# Altium PCB UF_Servo.PcbDoc (part 9 of 12)
Units mm, origin at the board's own origin, x right, y up, seen from the top; angles counter-clockwise.
Board outline 222.63 x 100.1 mm, 6 copper layers (L1, L2, L3, L4, L5, L6), stack 1.609 mm thick; 1138 components, 775 nets, 3720 pads, 1641 vias.
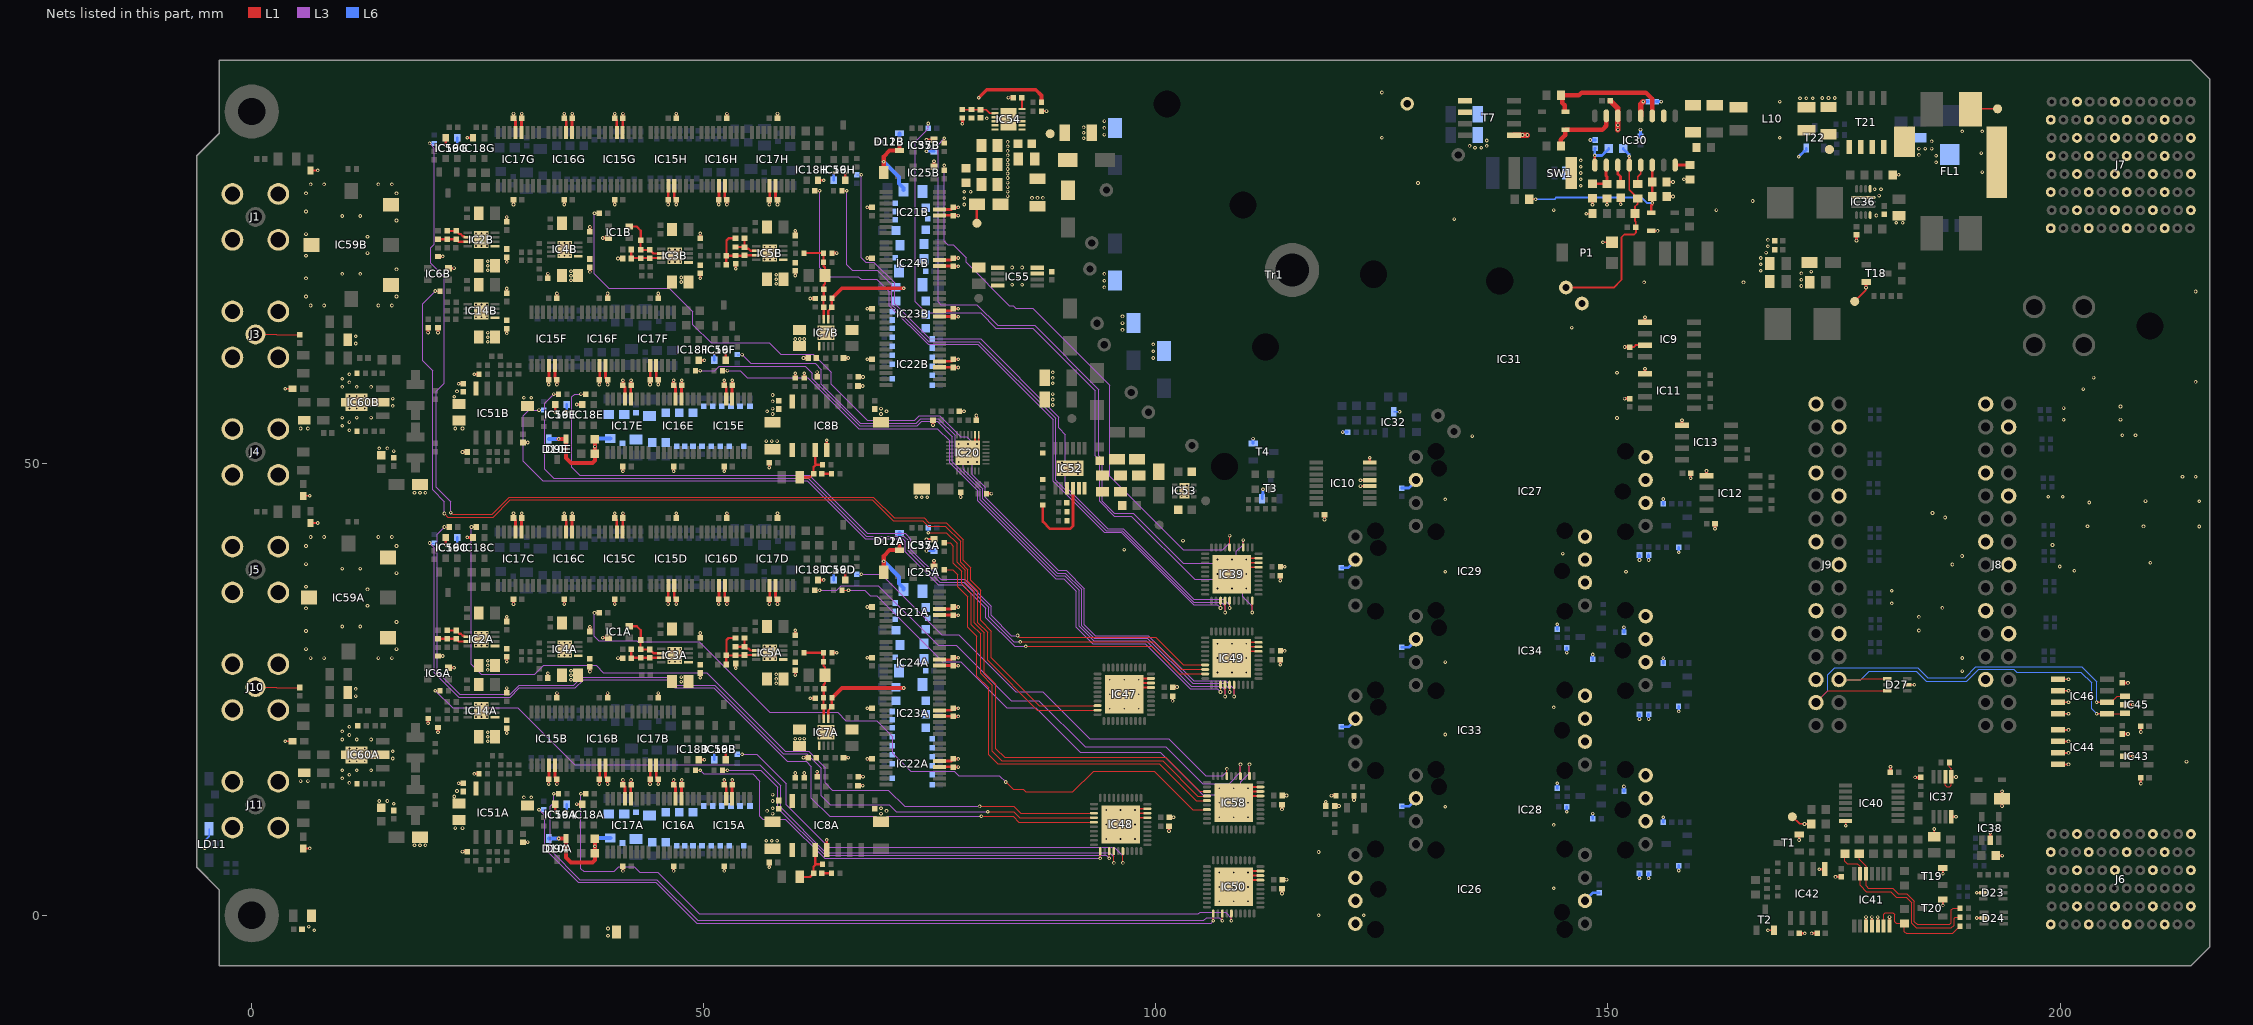
[diagram p10: the nets of this part, all layers, seen from the top]

## Via types
v1: diameter 0.4, hole 0.2, L1 to L6, tented both sides, 1545 vias
v2: diameter 0.4, hole 0.2, L1 to L6, 84 vias
v3: diameter 0.5, hole 0.25, L1 to L6, tented both sides, 12 vias

## Nets (pads, with @x,y where several pads share a name; then routed paths per layer and width w, separated by ;. In a path a pad name is that pad's centre, name@x,y a point inside that pad or via, vN(x,y) a via of type N, cw(c..) or ccw(c..) an arc to the next point about the centre after c; other vN are vias at no path point) (continued)
EXP0_P18: IC47.18 R207G.1 | length 131.2
  L1 w0.1: v1(22,44.6) 22.2,44.4 26.576,44.4 28.476,46.3 68.751,46.3 71.051,44 74.4,44 74.9,43.5 76.8,43.5 78.7,41.6 78.7,39.3 79.5,38.5 79.5,37.1 80.6,36 80.6,32.7 81.8,31.5 81.8,28.557 87.107,23.25 IC47.18@93.55,23.25
  L3 w0.1: v1(19.67,85.43) 20.2,84.9 20.2,74.3 19.8,73.9 19.8,72.151 21.3,70.651 21.3,58.9 20.4,58 20.4,47.4 22,45.8 v1(22,44.6)
  L6 w0.1: v1(19.67,85.43) R207G.1@20.2,85.43
EXP0_P31: IC39.23 R60H.1 | length 74.6
  L1 w0.1: R60H.1@62.27,80.2 v1(62.8,80.2) ; v1(107.15,34.05) IC39.23@107.15,34.85
  L3 w0.1: v1(62.8,80.2) 62.8,71.7 63.8,70.7 67.1,70.7 67.4,70.4 69.1,70.4 70.5,69 70.5,67.5 74.8,63.2 80.3,63.2 88.631,54.869 88.631,48.069 94.3,42.4 96.176,42.4 104.176,34.4 106.8,34.4 v1(107.15,34.05)
EXP1_P4: IC39.24 R61H.1 | length 73.5
  L1 w0.1: R61H.1@65.27,80.2 v1(65.8,80.2) ; v1(107.65,33.55) IC39.24@107.65,34.85
  L3 w0.1: v1(65.8,80.2) 65.8,72 66.4,71.4 69.2,71.4 70.8,69.8 70.8,67.6 74.9,63.5 80.424,63.5 88.9,55.024 88.9,48.2 94.5,42.6 96.276,42.6 104.176,34.7 107.2,34.7 107.65,34.25 v1(107.65,33.55)
EXP1_P5: IC39.25 R207H.1 | length 72.9
  L1 w0.1: v1(108.15,34.05) IC39.25@108.15,34.85
  L3 w0.1: v1(67.43,81.97) 67.43,72.77 67.9,72.3 68.8,72.3 71.1,70 71.1,67.7 75,63.8 80.6,63.8 89.236,55.164 89.236,53.964 90,53.2 90,47.5 94.7,42.8 96.393,42.8 104.193,35 107.5,35 108.15,34.35 v1(108.15,34.05)
  L6 w0.1: R207H.1@66.9,81.97 v1(67.43,81.97)
EXP1_P21: IC39.6 R63B.1 | length 63.2
  L1 w0.1: R63B.1@76.6,82.47 v1(76.6,83) ; IC39.6@108.15,40.75 v1(108.15,42.05)
  L3 w0.1: v1(76.6,83) 76.6,74.6 77,74.2 77.6,74.2 79,72.8 79,72.3 83.8,67.5 84.2,67.5 84.5,67.2 86.4,67.2 94.897,58.703 94.897,48.633 103.03,40.5 107.4,40.5 108.15,41.25 v1(108.15,42.05)
EXP1_P22: IC39.3 R64B.1 | length 74.4
  L1 w0.1: R64B.1@76.6,85.47 v1(76.6,86) ; IC39.3@109.65,40.75 v1(109.65,41.55)
  L3 w0.1: v1(76.6,86) 75.9,85.3 75.9,67.9 76.2,67.6 80.2,67.6 82.5,65.3 86.6,65.3 93.7,58.2 93.7,50.9 94.049,50.551 94.049,45.851 95.4,44.5 97.5,44.5 103,39 104.3,39 108.6,39 108.9,39.3 108.9,40.3 109.65,41.05 v1(109.65,41.55)
EXP1_P23: IC39.30 R209B.1 | length 81.7
  L1 w0.1: v1(110.65,33.55) IC39.30@110.65,34.85
  L3 w0.1: v1(74.83,87.63) 74.83,87.03 73.4,85.6 73.4,67.9 74.6,66.7 80.6,66.7 82.3,65 86.4,65 93.3,58.1 93.3,50.9 93.766,50.434 93.766,45.834 95.4,44.2 97.3,44.2 104.3,37.2 108.9,37.2 109.6,36.5 109.6,35.3 110.65,34.25 v1(110.65,33.55)
  L6 w0.1: R209B.1@74.83,87.1 v1(74.83,87.63)
EXP2_P9: IC49.24 R60F.1 | length 81
  L1 w0.1: R60F.1@49.07,60.3 v1(49.6,60.3) ; v1(107.65,24.25) IC49.24@107.65,25.55
  L3 w0.1: v1(49.6,60.3) 51.2,60.3 51.7,60.8 61.2,60.8 62,60 62,59.4 67.217,54.183 73.607,54.183 74.124,54.7 75.8,54.7 77.5,53 77.5,50.2 80.566,47.134 80.566,46.034 89,37.6 89.9,37.6 91.5,36 91.5,32 93.1,30.4 98.927,30.4 103.927,25.4 107.2,25.4 107.65,24.95 v1(107.65,24.25)
EXP2_P10: IC49.23 R61F.1 | length 75
  L1 w0.1: R61F.1@52.07,60.3 v1(52.6,60.3) ; v1(107.15,24.75) IC49.23@107.15,25.55
  L3 w0.1: v1(52.6,60.3) 54,60.3 54.8,59.5 61.5,59.5 67.117,53.883 75.817,53.883 77.183,52.517 77.183,50.117 80.283,47.017 80.283,45.917 88.9,37.3 89.8,37.3 91.2,35.9 91.2,31.9 93,30.1 98.803,30.1 103.803,25.1 104.3,25.1 106.8,25.1 v1(107.15,24.75)
EXP2_P11: IC49.25 R207F.1 | length 77.1
  L1 w0.1: v1(108.15,24.75) IC49.25@108.15,25.55
  L3 w0.1: v1(54.23,62.07) 55.2,61.1 62.3,61.1 63,60.4 63,58.8 67.317,54.483 73.483,54.483 74,55 75.924,55 77.8,53.124 77.8,50.9 78,50.7 78.4,50.7 78.7,50.4 78.7,49.4 80.849,47.251 80.849,46.151 89.1,37.9 90,37.9 91.8,36.1 91.8,32.1 93.2,30.7 99.051,30.7 104.051,25.7 107.5,25.7 108.15,25.05 v1(108.15,24.75)
  L6 w0.1: R207F.1@53.7,62.07 v1(54.23,62.07)
EXP2_P24: IC49.17 R60E.1 | length 89.8
  L1 w0.1: v1(36.4,57.7) R60E.1@36.93,57.7 ; v1(84.7,31) 84.9,30.8 99.964,30.8 103.014,27.75 IC49.17@105.45,27.75
  L3 w0.1: v1(36.4,57.7) 35.7,57.7 35.4,57.4 35.4,49.6 36.3,48.7 61.673,48.7 68.073,42.3 72.249,42.3 72.9,41.649 72.9,40.5 76.2,37.2 78.849,37.2 81.8,34.249 81.8,33.224 84.024,31 v1(84.7,31)
EXP2_P25: IC49.18 R61E.1 | length 92.7
  L1 w0.1: v1(33.4,57.7) R61E.1@33.93,57.7 ; v1(85,30.3) 99.757,30.3 102.807,27.25 IC49.18@105.45,27.25
  L3 w0.1: v1(33.4,57.7) 32.4,56.7 32.4,49.4 33.4,48.4 61.549,48.4 67.949,42 72.124,42 72.6,41.524 72.6,40.376 76.076,36.9 78.724,36.9 81.5,34.124 81.5,33.1 84.3,30.3 v1(85,30.3)
EXP2_P26: IC49.19 R207E.1 | length 94
  L1 w0.1: v1(85.6,29.8) 99.55,29.8 102.6,26.75 IC49.19@105.45,26.75
  L3 w0.1: v1(31.77,55.93) 30.63,55.93 30,55.3 30,50.3 32.2,48.1 61.424,48.1 67.824,41.7 72,41.7 72.3,41.4 72.3,40.251 75.951,36.6 78.6,36.6 81.2,34 81.2,32.976 84.376,29.8 v1(85.6,29.8)
  L6 w0.1: v1(31.77,55.93) R207E.1@32.3,55.93
EXP2_P27: IC47.19 R32B.1 | length 115.5
  L1 w0.1: v1(20.3,69.1) R32B.1@20.83,69.1 ; v1(21.3,44.5) 21.7,44.1 26.7,44.1 28.6,46 68.627,46 70.927,43.7 74.214,43.7 74.814,43.1 76.7,43.1 78.4,41.4 78.4,39.1 79.2,38.3 79.2,37 80.3,35.9 80.3,32.434 81.4,31.334 81.4,28.25 86.9,22.75 IC47.19@93.55,22.75
  L3 w0.1: v1(20.3,69.1) 18.9,67.7 18.9,61.4 20,60.3 20,47.1 21.3,45.8 v1(21.3,44.5)
EXP2_P28: IC49.26 R6B.1 | length 106.2
  L1 w0.1: v1(37.9,77.7) R6B.1@38.43,77.7 ; v1(108.65,24.25) IC49.26@108.65,25.55
  L3 w0.1: v1(37.9,77.7) 37.9,71 39.5,69.4 46.2,69.4 48.8,66.8 48.8,65.4 50.819,63.381 57.219,63.381 58.5,62.1 62.1,62.1 64.1,60.1 64.1,58.8 68.1,54.8 73.324,54.8 73.812,55.288 76.112,55.288 78.4,53 79.1,53 79.7,52.4 79.7,48.8 81.1,47.4 81.1,46.3 89.2,38.2 90.1,38.2 92.1,36.2 92.1,32.2 93.3,31 99.176,31 104.176,26 107.7,26 108.65,25.05 v1(108.65,24.25)
EXP2_P29: IC48.24 R32A.1 | length 86.6
  L1 w0.1: v1(20.3,24.9) R32A.1@20.83,24.9 ; v1(95.35,5.85) IC48.24@95.35,7.15
  L3 w0.1: v1(20.3,24.9) 22.2,23 29.4,23 35.7,16.7 56.2,16.7 58.5,14.4 58.5,12 63.5,7 94.9,7 95.35,6.55 v1(95.35,5.85)
EXP2_P30: IC58.17 R6A.1 | length 81.8
  L1 w0.1: v1(37.9,33.5) R6A.1@38.43,33.5 ; v1(83.4,14.8) 84.2,14 85.3,14 85.6,13.7 90.8,13.7 93.1,16 99.8,16 104.05,11.75 IC58.17@105.65,11.75
  L3 w0.1: v1(37.9,33.5) 37.9,30.9 38.4,30.4 42.6,30.4 42.7,30.3 49.5,30.3 57.3,22.5 64.8,22.5 65.7,21.6 69.1,21.6 70.9,19.8 70.9,18 72.9,16 77.7,16 78.2,15.5 82.7,15.5 v1(83.4,14.8)
EXP3_P16: IC48.13 R60C.1 | length 93.2
  L1 w0.1: v1(24.3,43) R60C.1@24.83,43 ; v1(80.5,12.1) 84.3,12.1 85.05,11.35 IC48.13@93.15,11.35
  L3 w0.1: v1(24.3,43) 24.3,27.8 25.4,26.7 31.3,26.7 32.3,27.7 38.1,27.7 38.9,26.9 50.3,26.9 59,18.2 61.6,18.2 63.4,16.4 63.4,14.7 64.2,13.9 70.4,13.9 72.2,12.1 v1(80.5,12.1)
EXP3_P17: IC48.14 R61C.1 | length 99.5
  L1 w0.1: v1(21.3,43) R61C.1@21.83,43 ; v1(81.4,11.5) 84.3,11.5 84.95,10.85 IC48.14@93.15,10.85
  L3 w0.1: v1(21.3,43) 20.5,42.2 20.5,27 23,24.5 28.6,24.5 29.6,25.5 35.6,25.5 36.5,26.4 46.1,26.4 47,25.5 51.2,25.5 58.8,17.9 61.4,17.9 63,16.3 63,13.3 64,12.3 70.5,12.3 71.3,11.5 v1(81.4,11.5)
EXP3_P18: IC48.15 R207C.1 | length 98.6
  L1 w0.1: v1(80.7,11) 84.2,11 84.85,10.35 IC48.15@93.15,10.35
  L3 w0.1: v1(19.67,41.23) 20.2,40.7 20.2,26.876 22.876,24.2 28.6,24.2 29.6,25.2 35.8,25.2 36.7,26.1 45.9,26.1 46.8,25.2 51.1,25.2 59.2,17.1 61.3,17.1 61.9,16.5 61.9,13 63.9,11 69,11 69.1,10.9 70.2,10.9 70.3,11 v1(80.7,11)
  L6 w0.1: v1(19.67,41.23) R207C.1@20.2,41.23
EXP3_P31: IC58.4 R60D.1 | length 59.1
  L1 w0.1: R60D.1@62.27,36 v1(62.8,36) ; IC58.4@109.35,15.45 v1(109.35,16.75)
  L3 w0.1: v1(62.8,36) 64.7,36 65.2,36.5 69.3,36.5 75.9,29.9 77.9,29.9 84,23.8 87.063,23.8 92.163,18.7 101.097,18.7 105.197,14.6 108.1,14.6 109.35,15.85 v1(109.35,16.75)
EXP4_P4: IC58.2 R61D.1 | length 58.2
  L1 w0.1: R61D.1@65.27,36 v1(66,36) ; IC58.2@110.35,15.45 v1(110.35,16.75)
  L3 w0.1: v1(66,36) 67.8,36 68.4,35.4 69.1,35.4 76.4,28.1 78.4,28.1 83.5,23 86.731,23 91.631,18.1 100.5,18.1 105.2,13.4 105.5,13.4 108.9,13.4 109.4,13.9 109.4,14.8 110.35,15.75 v1(110.35,16.75)
EXP4_P5: IC58.7 R207D.1 | length 51.5
  L1 w0.1: IC58.7@107.85,15.45 v1(107.85,16.25)
  L3 w0.1: v1(67.43,37.77) 69.63,37.77 76.3,31.1 78.2,31.1 84.5,24.8 87.477,24.8 92.677,19.6 101.4,19.6 105.5,15.5 107.4,15.5 107.85,15.95 v1(107.85,16.25)
  L6 w0.1: R207D.1@66.9,37.77 v1(67.43,37.77)
EXP4_P22: IC58.15 R63A.1 | length 49.3
  L1 w0.1: R63A.1@76.6,38.27 77.53,38.27 78.1,37.7 78.1,36.4 79.2,35.3 79.2,31.9 80.2,30.9 80.2,26.5 81.5,25.2 81.5,17.8 82.486,16.814 100.386,16.814 104.45,12.75 IC58.15@105.65,12.75
EXP4_P23: IC58.14 R64A.1 | length 51.4
  L1 w0.1: R64A.1@76.6,41.27 77.23,41.27 77.6,40.9 77.6,39 78.5,38.1 78.5,36.7 79.6,35.6 79.6,32.2 80.6,31.2 80.6,26.8 81.9,25.5 81.9,18.2 82.932,17.168 100.732,17.168 104.65,13.25 IC58.14@105.65,13.25
EXP4_P24: IC58.13 R209A.1 | length 54
  L1 w0.1: v1(74.83,42.37) 76.83,42.37 78,41.2 78,39.1 78.9,38.2 78.9,36.9 79.9,35.9 79.9,32.4 81,31.3 81,26.9 82.3,25.6 82.3,18.5 83.279,17.521 101.079,17.521 104.85,13.75 IC58.13@105.65,13.75
  L6 w0.1: v1(74.83,42.37) R209A.1@74.83,42.9
EXP5_24: IC50.25 R60A.1 | length 84.7
  L1 w0.1: v1(36.4,13.5) R60A.1@36.93,13.5 ; v1(108.35,-0.55) IC50.25@108.35,0.25
  L3 w0.1: v1(36.4,13.5) 36.4,5.2 36.7,4.9 40.1,4.9 40.6,5.4 42.3,5.4 42.9,4.8 44.9,4.8 49.5,0.2 104.7,0.2 104.9,0.4 107.7,0.4 108.35,-0.25 v1(108.35,-0.55)
EXP5_25: IC50.23 R61A.1 | length 85.5
  L1 w0.1: v1(33.4,13.5) R61A.1@33.93,13.5 ; v1(107.35,-0.55) IC50.23@107.35,0.25
  L3 w0.1: v1(33.4,13.5) 33.4,12.5 33,12.1 33,7.3 36.3,4 44.8,4 49.3,-0.5 105.3,-0.5 105.6,-0.2 107,-0.2 v1(107.35,-0.55)
EXP5_26: IC50.21 R207A.1 | length 83.4
  L1 w0.1: v1(106.35,-0.55) IC50.21@106.35,0.25
  L3 w0.1: v1(31.77,11.73) 32.4,11.1 32.4,7.4 36.1,3.7 44.7,3.7 49.2,-0.8 106.1,-0.8 v1(106.35,-0.55)
  L6 w0.1: v1(31.77,11.73) R207A.1@32.3,11.73
EXP5_P9: IC48.21 R60B.1 | length 51.9
  L1 w0.1: R60B.1@49.07,16.1 v1(49.6,16.1) ; v1(93.85,6.35) IC48.21@93.85,7.15
  L3 w0.1: v1(49.6,16.1) 50,15.7 55.4,15.7 56.2,14.9 56.2,11 56.5,10.7 59,10.7 63.35,6.35 v1(93.85,6.35)
EXP5_P10: IC48.23 R61B.1 | length 49
  L1 w0.1: R61B.1@52.07,16.1 v1(52.6,16.1) ; v1(94.85,6.35) IC48.23@94.85,7.15
  L3 w0.1: v1(52.6,16.1) 56.3,16.1 58.2,14.2 58.2,11.9 63.4,6.7 94.5,6.7 v1(94.85,6.35)
EXP5_P11: IC48.26 R207B.1 | length 50.7
  L1 w0.1: v1(96.35,5.85) IC48.26@96.35,7.15
  L3 w0.1: v1(54.23,17.87) 55.83,17.87 59.1,14.6 59.1,12.3 63.8,7.6 95.4,7.6 96.35,6.65 v1(96.35,5.85)
  L6 w0.1: R207B.1@53.7,17.87 v1(54.23,17.87)
GA0: IC41.6 R130.1 R180.2 | length 12.1
  L1 w0.125: IC41.6@180.494,-1.144 180.494,0.156 180.694,0.356 181.494,0.356 181.694,0.156 181.694,-0.644 181.894,-0.844 R180.2@182.794,-0.844 182.794,-1.744 182.994,-1.944 188.124,-1.944 188.676,-1.392 188.696,-1.392 188.924,-1.164 R130.1@188.924,-1.144
GA1: IC41.12 R131.1 R178.2 | length 18.9
  L1 w0.125: R178.2@177.794,6.856 177.794,6.256 178.544,5.506 IC41.12@178.544,4.656 178.544,3.306 178.794,3.056 181.494,3.056 182.094,2.456 183.024,2.456 183.894,1.586 183.894,-0.644 184.194,-0.944 187.794,-0.944 187.994,-0.744 187.994,0.656 188.194,0.856 R131.1@188.924,0.856 R131.1@188.924,0.876
GA2: IC41.13 R136.1 R165.2 | length 20.2
  L1 w0.125: R165.2@176.194,6.856 176.194,6.056 176.494,5.756 177.594,5.756 177.894,5.456 IC41.13@177.894,4.656 177.894,3.356 178.594,2.656 181.294,2.656 181.894,2.056 182.994,2.056 183.594,1.456 183.594,-0.844 184.094,-1.344 187.994,-1.344 188.294,-1.044 188.294,-0.244 188.394,-0.144 R136.1@188.924,-0.144 ; R136.1@188.924,-0.164 R136.1@188.924,-0.144 ; R136.1@188.924,-0.124 R136.1@188.924,-0.144
GND: C4A.1 C4B.1 C5A.1 C5B.1 C8A.1 C8B.1 C9A.1 C9B.1 C11A.1 C11B.1 C12A.1 C12B.1 C13A.1 C13B.1 C14A.1 C14B.1 C15A.1 C15B.1 C16A.1 C16B.1 C17A.1 C17B.1 C18A.1 C18B.1 C19A.2 C19B.2 C21A.1 C21B.1 C22A.1 C22B.1 C24A.1 C24B.1 C25A.1 C25B.1 C26A.1 C26B.1 C27A.1 C27B.1 C28A.1 C28B.1 C29A.1 C29B.1 C30A.1 C30B.1 C31A.1 C31B.1 C32A.1 C32B.1 C33A.1 C33B.1 C34A.1 C34B.1 C35A.1 C35B.1 C36A.1 C36B.1 C37A.1 C37B.1 C38A.1 C38B.1 C39A.2 C39E.2 C40A.1 C40E.1 C41A.1 C41E.1 C42A.1 C42E.1 C43A.1 C43E.1 C44A.2 C44E.2 C45A.1 C45B.1 C45C.1 C45D.1 C45E.1 C45F.1 C45G.1 C45H.1 C46A.1 C46B.1 C46C.1 C46D.1 C46E.1 C46F.1 C46G.1 C46H.1 C47A.1 C47E.1 C48A.2 C48E.2 C49A.1 C49E.1 C50A.1 C50E.1 C51A.1 C51E.1 C52A.1 C52E.1 C53A.1 C53E.1 C54A.2 C54E.2 C55A.1 C55E.1 C58.1 C61A.1 C61E.1 C62A.1 C62B.1 C62C.1 C62D.1 C62E.1 C62F.1 C62G.1 C62H.1 C63A.1 C63B.1 C63C.1 C63D.1 C63E.1 C63F.1 C63G.1 C63H.1 C64A.2 C64E.2 C65A.1 C65E.1 C66A.1 C66E.1 C67A.2 C67E.2 C68A.1 C68E.1 C69A.1 C69E.1 C70A.1 C70E.1 C71A.1 C71E.1 C72A.1 C72E.1 C73.2 C74.2 C75A.1 C75E.1 C76A.1 C76B.1 C76C.1 C76D.1 C76E.1 C76F.1 C76G.1 C76H.1 C77A.1 C77B.1 C77C.1 C77D.1 C77E.1 C77F.1 C77G.1 C77H.1 C78A.1 C78E.1 C79A.1 C79E.1 C89A.1 C89B.1 C92.2 C93.2 C94A.1 C94B.1 C95A.1 C95B.1 C96A.1 C96B.1 C103A.1 C103B.1 C104A.1 C104B.1 C115A.1 C115B.1 C116A.1 C116B.1 C122.1 C123.1 C124.1 C127.1 C128.1 C148.1 C149.1 C177A.1 C177B.1 C178A.1 C178B.1 C184.1 C185.1 C186.1 C187.1 C188.1 C189A.1 C189B.1 C190A.1 C190B.1 C191.1 C192.1 C193.1 C194.1 C195.2 C196.1 C197.1 C198.1 C199.2 C200.1 C201.1 C202.1 C203.1 C204.1 C205.1 C206.2 C207.1 C208.1 C209.1 C210.1 C211.1 C212.1 C213.1 C214.1 C215.1 C217A.2 C217B.2 C218A.1 C218B.1 C221A.2 C221B.2 D5.2 D6.2 D9A.1 D9E.1 D10A.1 D10E.1 D15.1 D16.1 D17A.1 D17B.1 D18A.1 D18B.1 D19A.1 D19B.1 IC1A.2 IC1B.2 IC2A.9 IC2B.9 IC3A.9 IC3B.9 IC4A.9 IC4B.9 IC5A.9 IC5B.9 IC6A.2 IC6B.2 IC7A.9 IC7B.9 IC8A.11 IC8B.11 IC10.4 IC10.5 IC10.8 IC14A.9 IC14B.9 IC15A.5 IC15B.5 IC15C.5 IC15D.5 IC15E.5 IC15F.5 IC15G.5 IC15H.5 IC16A.5 IC16B.5 IC16C.5 IC16D.5 IC16E.5 IC16F.5 IC16G.5 IC16H.5 IC17A.5 IC17B.5 IC17C.5 IC17D.5 IC17E.5 IC17F.5 IC17G.5 IC17H.5 IC18A.2 IC18B.2 IC18C.2 IC18D.2 IC18E.2 IC18F.2 IC18G.2 IC18H.2 IC19A.2 IC19B.2 IC19C.2 IC19D.2 IC19E.2 IC19F.2 IC19G.2 IC19H.2 IC20.15 IC20.16 IC20.29 IC21A.5 IC21B.5 IC22A.5 IC22B.5 IC23A.5 IC23B.5 IC24A.5 IC24B.5 IC25A.2 IC25B.2 IC26.2 IC26.3 IC26.4 IC27.7 IC28.7 IC29.7 IC32.3 IC33.7 IC34.7 IC35A.2 IC35B.2 IC39.37 IC39.38 IC39.39 IC39.41 IC47.37 IC47.38 IC47.39 IC47.41 IC48.37 IC48.38 IC48.39 IC48.41 IC49.37 IC49.38 IC49.39 IC49.41 IC50.37 IC50.38 IC50.39 IC50.41 IC52.9 IC52.13 IC53.5 IC53.7 IC54.9 IC55.3 IC55.4 IC55.5 IC55.8 IC56A.2 IC56B.2 IC56C.2 IC56D.2 IC56E.2 IC56F.2 IC56G.2 IC56H.2 IC57A.2 IC57B.2 IC58.37 IC58.38 IC58.39 IC58.41 IC59A.4 IC59A.5 IC59A.6 IC59B.4 IC59B.5 IC59B.6 IC60A.2 IC60A.4 IC60B.2 IC60B.4 J1.2 J3.2 J4.2 J5.2 J10.2 J11.2 R12A.1 R12B.1 R17A.1 R17B.1 R19A.1 R19B.1 R22A.1 R22B.1 R41A.1 R41B.1 R44A.1 R44B.1 R47A.1 R47B.1 R51A.1 R51B.1 R52A.1 R52B.1 R55A.2 R55B.2 R58A.1 R58B.1 R69A.1 R69B.1 R74A.1 R74B.1 R78.1 R83.1 R84.1 R116.1 R118.1 R122.1 R123.1 R124.1 R125.1 R198.1 R199.1 R200.1 R201.1 R203.2 R204.1 R205.1 R206.1 R211.1 R213A.1 R213B.1 R220A.1 R220B.1 R221A.1 R221B.1 R222A.1 R222B.1 R223A.1 R223B.1 T3.2 T4.2 | length 243.9
  L1 w0.2: v1(3.7,19.3) D19A.1@4.5,19.3 ; v1(3.7,58.3) D19B.1@4.5,58.3 ; D17A.1@5.7,7.45 v1(6.4,7.45) ; D17B.1@5.7,46.45 v1(6.4,46.45) ; D18A.1@6.5,43.45 v1(7.3,43.45) ; D18B.1@6.5,82.45 v1(7.3,82.45) ; v1(79.2,51.2) IC20.29@80,52 ; IC20.16@80,53.2 IC20.29@80,52 ; IC20.15@80.4,53.2 80.4,52.4 IC20.29@80,52 ; v1(83.68,90.5) R204.1@84.23,90.5 ; R203.2@87.35,89 v1(87.9,89) ; v1(96.1,10.1) 96.85,10.85 IC48.37@99.05,10.85 ; v1(96.5,24.5) 97.25,25.25 IC47.37@99.45,25.25 ; IC48.38@99.05,11.35 98.05,11.35 v1(97.7,11.7) 97.85,11.85 IC48.39@99.05,11.85 ; IC47.38@99.45,25.75 98.45,25.75 v1(98.1,26.1) 98.25,26.25 IC47.39@99.45,26.25 ; v1(108.4,28.5) 109.15,29.25 IC49.37@111.35,29.25 ; v1(108.4,37.8) 109.15,38.55 IC39.37@111.35,38.55 ; v1(108.6,3.2) 109.35,3.95 IC50.37@111.55,3.95 ; v1(108.6,12.5) 109.35,13.25 IC58.37@111.55,13.25 ; IC49.38@111.35,29.75 110.35,29.75 v1(110,30.1) 110.15,30.25 IC49.39@111.35,30.25 ; IC39.38@111.35,39.05 110.35,39.05 v1(110,39.4) 110.15,39.55 IC39.39@111.35,39.55 ; IC50.38@111.55,4.45 110.55,4.45 v1(110.2,4.8) 110.35,4.95 IC50.39@111.55,4.95 ; IC58.38@111.55,13.75 110.55,13.75 v1(110.2,14.1) 110.35,14.25 IC58.39@111.55,14.25 ; v1(122.625,47.525) IC10.4@123.65,47.525 ; v1(122.625,48.175) IC10.5@123.65,48.175
  L1 w0.3: v1(19.5,21.3) R213A.1@19.5,21.83 ; v1(19.5,64.5) R213B.1@19.5,65.03 ; v1(20.6,20.3) R58A.1@20.6,20.83 ; R12A.1@20.6,28.73 v1(21.13,28.73) ; v1(20.6,64.5) R58B.1@20.6,65.03 ; R12B.1@20.6,72.93 v1(21.13,72.93) ; v1(21.465,41.02) IC19C.2@21.465,41.85 ; v1(21.465,85.22) IC19G.2@21.465,86.05 ; IC6A.2@21.75,27.435 v1(22.38,27.435) ; IC6B.2@21.75,71.635 v1(22.38,71.635) ; v1(22.87,14.65) C95A.1@23.4,14.65 ; v1(22.87,58.85) C95B.1@23.4,58.85 ; v1(23.3,7.1) R69A.1@23.83,7.1 ; v1(23.3,51.3) R69B.1@23.83,51.3 ; v1(23.835,41.85) IC18C.2@24.465,41.85 ; v1(23.835,86.05) IC18G.2@24.465,86.05 ; v1(24.6,15.7) R74A.1@25.13,15.7 ; v1(24.6,59.9) R74B.1@25.13,59.9 ; v1(28.2,20.22) C38A.1@28.2,20.75 ; C24A.1@28.2,24.65 v1(28.2,25.18) ; v1(28.2,28.12) C22A.1@28.2,28.65 ; C4A.1@28.2,32.55 v1(28.2,33.08) ; v1(28.2,64.42) C38B.1@28.2,64.95 ; C24B.1@28.2,68.85 v1(28.2,69.38) ; v1(28.2,72.32) C22B.1@28.2,72.85 ; C4B.1@28.2,76.75 v1(28.2,77.28) ; v1(28.95,34.47) C76C.1@28.95,35 ; v1(28.95,44.53) C77C.1@28.95,44 29.175,43.775 IC17C.5@29.175,42.45 ; v1(28.95,78.67) C76G.1@28.95,79.2 ; v1(28.95,88.73) C77G.1@28.95,88.2 29.175,87.975 IC17G.5@29.175,86.65 ; C189A.1@30,8.15 v1(30.53,8.15) ; C189B.1@30,52.35 v1(30.53,52.35) ; C34A.1@32.75,26.3 v1(32.75,26.83) ; C34B.1@32.75,70.5 v1(32.75,71.03) ; IC15B.5@33.525,16.65 33.525,15.325 C46B.1@33.75,15.1 v1(33.75,14.57) ; IC15F.5@33.525,60.85 33.525,59.525 C46F.1@33.75,59.3 v1(33.75,58.77) ; v1(33.565,11.52) IC19A.2@33.565,12.35 ; v1(33.565,55.72) IC19E.2@33.565,56.55 ; C45B.1@33.75,24.1 v1(33.75,24.63) ; C45F.1@33.75,68.3 v1(33.75,68.83) ; v1(34.55,34.47) C62C.1@34.55,35 ; v1(34.55,44.53) C63C.1@34.55,44 34.775,43.775 IC16C.5@34.775,42.45 ; v1(34.55,78.67) C62G.1@34.55,79.2 ; v1(34.55,88.73) C63G.1@34.55,88.2 34.775,87.975 IC16G.5@34.775,86.65 ; v1(35.935,12.35) IC18A.2@36.565,12.35 ; v1(35.935,56.55) IC18E.2@36.565,56.55 ; v1(37.4,27.02) C29A.1@37.4,27.55 ; C13A.1@37.4,31.45 v1(37.4,31.98) ; v1(37.4,71.22) C29B.1@37.4,71.75 ; C13B.1@37.4,75.65 v1(37.4,76.18) ; v1(38.82,30.765) IC1A.2@39.45,30.765 ; v1(38.82,74.965) IC1B.2@39.45,74.965 ; IC16B.5@39.125,16.65 39.125,15.325 C63B.1@39.35,15.1 v1(39.35,14.57) ; IC16F.5@39.125,60.85 39.125,59.525 C63F.1@39.35,59.3 v1(39.35,58.77) ; C62B.1@39.35,24.1 v1(39.35,24.63) ; C62F.1@39.35,68.3 v1(39.35,68.83) ; v1(40.15,34.47) C45C.1@40.15,35 ; v1(40.15,44.53) C46C.1@40.15,44 40.375,43.775 IC15C.5@40.375,42.45 ; v1(40.15,78.67) C45G.1@40.15,79.2 ; v1(40.15,88.73) C46G.1@40.15,88.2 40.375,87.975 IC15G.5@40.375,86.65 ; v1(40.5,28.5) R22A.1@41.03,28.5 ; v1(40.5,72.7) R22B.1@41.03,72.7 ; v1(41.05,4.97) C76A.1@41.05,5.5 ; v1(41.05,15.03) C77A.1@41.05,14.5 41.275,14.275 IC17A.5@41.275,12.95 ; v1(41.05,49.17) C76E.1@41.05,49.7 ; v1(41.05,59.23) C77E.1@41.05,58.7 41.275,58.475 IC17E.5@41.275,57.15 ; IC17B.5@44.725,16.65 44.725,15.325 C77B.1@44.95,15.1 v1(44.95,14.57) ; IC17F.5@44.725,60.85 44.725,59.525 C77F.1@44.95,59.3 v1(44.95,58.77) ; C76B.1@44.95,24.1 v1(44.95,24.63) ; C76F.1@44.95,68.3 v1(44.95,68.83) ; v1(46.65,4.97) C62A.1@46.65,5.5 ; v1(46.65,15.03) C63A.1@46.65,14.5 46.875,14.275 IC16A.5@46.875,12.95 ; v1(46.65,49.17) C62E.1@46.65,49.7 ; v1(46.65,59.23) C63E.1@46.65,58.7 46.875,58.475 IC16E.5@46.875,57.15 ; IC15D.5@46.725,36.55 46.725,35.225 C46D.1@46.95,35 v1(46.95,34.47) ; IC15H.5@46.725,80.75 46.725,79.425 C46H.1@46.95,79.2 v1(46.95,78.67) ; C45D.1@46.95,44 v1(46.95,44.53) ; C45H.1@46.95,88.2 v1(46.95,88.73) ; IC18B.2@49.435,17.25 v1(50.065,17.25) ; IC18F.2@49.435,61.45 v1(50.065,61.45) ; v1(49.6,26.32) C27A.1@49.6,26.85 ; C11A.1@49.6,30.75 v1(49.6,31.28) ; v1(49.6,70.52) C27B.1@49.6,71.05 ; C11B.1@49.6,74.95 v1(49.6,75.48) ; v1(52.25,4.97) C45A.1@52.25,5.5 ; v1(52.25,15.03) C46A.1@52.25,14.5 52.475,14.275 IC15A.5@52.475,12.95 ; v1(52.25,49.17) C45E.1@52.25,49.7 ; v1(52.25,59.23) C46E.1@52.25,58.7 52.475,58.475 IC15E.5@52.475,57.15 ; IC16D.5@52.325,36.55 52.325,35.225 C63D.1@52.55,35 v1(52.55,34.47) ; IC16H.5@52.325,80.75 52.325,79.425 C63H.1@52.55,79.2 v1(52.55,78.67) ; IC19B.2@52.435,17.25 v1(52.435,18.08) ; IC19F.2@52.435,61.45 v1(52.435,62.28) ; C62D.1@52.55,44 v1(52.55,44.53) ; C62H.1@52.55,88.2 v1(52.55,88.73) ; v1(53.53,27.37) R41A.1@53.53,27.9 ; v1(53.53,71.57) R41B.1@53.53,72.1 ; v1(57.23,5.37) R55A.2@57.23,5.9 ; v1(57.23,49.57) R55B.2@57.23,50.1 ; IC17D.5@57.925,36.55 57.925,35.225 C77D.1@58.15,35 v1(58.15,34.47) ; IC17H.5@57.925,80.75 57.925,79.425 C77H.1@58.15,79.2 v1(58.15,78.67) ; C76D.1@58.15,44 v1(58.15,44.53) ; C76H.1@58.15,88.2 v1(58.15,88.73) ; R51A.1@60.1,15.27 v1(60.1,15.8) ; v1(60.1,26.62) C31A.1@60.1,27.15 ; C15A.1@60.1,31.05 v1(60.1,31.58) ; R51B.1@60.1,59.47 v1(60.1,60) ; v1(60.1,70.82) C31B.1@60.1,71.35 ; C15B.1@60.1,75.25 v1(60.1,75.78) ; v1(61.02,17.5) C33A.1@61.55,17.5 ; v1(61.02,61.7) C33B.1@61.55,61.7 ; R52A.1@61.1,15.27 v1(61.1,15.8) ; R52B.1@61.1,59.47 v1(61.1,60) ; v1(61.77,24.07) R44A.1@62.3,24.07 ; v1(61.77,68.27) R44B.1@62.3,68.27 ; R47A.1@62.53,15.4 v1(62.53,15.93) ; R47B.1@62.53,59.6 v1(62.53,60.13) ; IC18D.2@62.635,37.15 v1(63.265,37.15) ; IC18H.2@62.635,81.35 v1(63.265,81.35) ; IC8A.11@63.6,7.3 v1(63.6,8.4) ; IC8B.11@63.6,51.5 v1(63.6,52.6) ; R19A.1@64.17,29.1 v1(64.7,29.1) ; R19B.1@64.17,73.3 v1(64.7,73.3) ; C17A.1@65.45,17.5 v1(65.98,17.5) ; C17B.1@65.45,61.7 v1(65.98,61.7) ; IC19D.2@65.635,37.15 v1(65.635,37.98) ; IC19H.2@65.635,81.35 v1(65.635,82.18) ; C19A.2@67.05,14.4 v1(67.58,14.4) ; C19B.2@67.05,58.6 v1(67.58,58.6) ; R17A.1@67.07,15.4 v1(67.6,15.4) ; R17B.1@67.07,59.6 v1(67.6,59.6) ; v1(68.07,17.35) C103A.1@68.6,17.35 ; v1(68.07,22.95) C115A.1@68.6,22.95 ; v1(68.07,28.55) C177A.1@68.6,28.55 ; v1(68.07,34.15) C89A.1@68.6,34.15 ; v1(68.07,61.55) C103B.1@68.6,61.55 ; v1(68.07,67.15) C115B.1@68.6,67.15 ; v1(68.07,72.75) C177B.1@68.6,72.75 ; v1(68.07,78.35) C89B.1@68.6,78.35 ; v1(74.62,41.635) IC35A.2@75.45,41.635 ; v1(74.62,85.835) IC35B.2@75.45,85.835 ; v1(75.35,54.27) C192.1@75.35,54.8 ; IC25A.2@75.45,38.635 v1(75.45,39.265) ; IC25B.2@75.45,82.835 v1(75.45,83.465) ; IC22A.5@76.05,17.125 77.375,17.125 C104A.1@77.6,17.35 v1(78.13,17.35) ; IC23A.5@76.05,22.725 77.375,22.725 C116A.1@77.6,22.95 v1(78.13,22.95) ; IC24A.5@76.05,28.325 77.375,28.325 C178A.1@77.6,28.55 v1(78.13,28.55) ; IC21A.5@76.05,33.925 77.375,33.925 C96A.1@77.6,34.15 v1(78.13,34.15) ; IC22B.5@76.05,61.325 77.375,61.325 C104B.1@77.6,61.55 v1(78.13,61.55) ; IC23B.5@76.05,66.925 77.375,66.925 C116B.1@77.6,67.15 v1(78.13,67.15) ; IC24B.5@76.05,72.525 77.375,72.525 C178B.1@77.6,72.75 v1(78.13,72.75) ; IC21B.5@76.05,78.125 77.375,78.125 C96B.1@77.6,78.35 v1(78.13,78.35) ; C191.1@78.25,55.8 v1(78.78,55.8) ; v1(78.4,46.32) C193.1@78.4,46.85 ; v1(78.6,87.6) R206.1@78.6,88.23 ; C194.1@80.15,54.8 v1(80.15,55.33) ; R78.1@81.27,46.7 v1(81.8,46.7) ; R123.1@101.42,10.9 v1(101.95,10.9) ; v1(101.45,9.37) C186.1@101.45,9.9 ; R125.1@101.82,25.3 v1(102.35,25.3) ; v1(101.85,23.77) C185.1@101.85,24.3 ; R124.1@113.72,29.3 v1(114.25,29.3) ; R122.1@113.72,38.6 v1(114.25,38.6) ; v1(113.75,27.77) C187.1@113.75,28.3 ; v1(113.75,37.07) C184.1@113.75,37.6 ; R116.1@113.92,4 v1(114.45,4) ; R211.1@113.92,13.3 v1(114.45,13.3) ; v1(113.95,2.47) C188.1@113.95,3 ; v1(113.95,11.77) C215.1@113.95,12.3 ; v1(118.65,43.82) C58.1@118.65,44.35 ; C123.1@118.776,12.094 v1(118.776,12.624) ; v1(119.426,13.294) R84.1@119.956,13.294 ; C122.1@119.726,12.144 v1(120.256,12.144) ; v1(121.906,12.814) R83.1@121.906,13.344 ; IC10.8@123.65,50.125 v1(123.65,50.655)
  L1 w0.45: v1(33.95,8.55) D9A.1@34.75,8.55 34.75,6.45 35.3,5.9 37.686,5.9 37.95,6.164 C78A.1@37.95,6.9 v1(37.95,7.7) C79A.1@37.95,8.5 ; v1(33.95,52.75) D9E.1@34.75,52.75 34.75,50.65 35.3,50.1 37.686,50.1 37.95,50.364 C78E.1@37.95,51.1 v1(37.95,51.9) C79E.1@37.95,52.7
  L6 w0.2: IC32.3@126.3,55.75 v1(126.95,55.75)
  L6 w0.3: v1(22.735,41.02) IC56C.2@22.735,41.85 ; v1(22.735,85.22) IC56G.2@22.735,86.05 ; v1(34.835,11.52) IC56A.2@34.835,12.35 ; v1(34.835,55.72) IC56E.2@34.835,56.55 ; IC56B.2@51.165,17.25 v1(51.165,18.08) ; IC56F.2@51.165,61.45 v1(51.165,62.28) ; IC56D.2@64.365,37.15 v1(64.365,37.98) ; IC56H.2@64.365,81.35 v1(64.365,82.18) ; v1(74.62,40.365) IC57A.2@75.45,40.365 ; v1(74.62,84.565) IC57B.2@75.45,84.565 ; T4.2@110.75,52.25 v1(110.75,52.78) ; T3.2@111.75,46.15 111.75,46.575 111.85,46.675 v1(111.85,47.18) ; C148.1@120.494,20.906 121.287,20.906 122.032,21.65 IC33.7@122.062,21.65 ; C128.1@120.494,38.506 121.287,38.506 122.032,39.25 IC29.7@122.062,39.25 ; v1(120.67,53.5) R118.1@121.2,53.5 ; C127.1@127.194,12.106 127.987,12.106 128.732,12.85 IC28.7@128.762,12.85 ; C149.1@127.194,29.706 127.987,29.706 128.732,30.45 IC34.7@128.762,30.45 ; C124.1@127.194,47.306 127.987,47.306 128.732,48.05 IC27.7@128.762,48.05
  L6 w0.45: D10A.1@32.85,8.55 v1(33.95,8.55) ; D10E.1@32.85,52.75 v1(33.95,52.75) ; v1(37.95,7.7) 37.95,8.25 38.3,8.6 C71A.1@39.65,8.6 ; v1(37.95,51.9) 37.95,52.45 38.3,52.8 C71E.1@39.65,52.8
  other v1: 117.994,0.056 122.994,0.056 107,1.6 108.6,1.6 110.2,1.6 107,3.2 110.2,3.2 107,4.8 108.6,4.8 117.994,7.056 18,7.8 18.6,7.8 19.2,7.8 94.5,8.5 96.1,8.5 97.7,8.5 22.5,9.7 23.3,9.7 94.5,10.1 97.7,10.1 107,10.9 108.6,10.9 110.2,10.9 57.6,11.3 69.6,11.3 57,11.6 70.2,11.6 94.5,11.7 96.1,11.7 57.6,11.9 69.6,11.9 131.994,12.056 15.7,12.4 107,12.5 110.2,12.5 14.1,12.7 15,12.7 30.1,13.1 30.9,13.1 107,14.1 108.6,14.1 10.8,14.7 5.4,14.9 6.2,14.9 10,15.2 10.8,15.6 10,16.1 11.6,16.1 13.2,16.1 15.6,17.4 15.6,18.2 10,19.5 11.6,19.5 13.2,19.5 10.8,20 131.994,20.056 10,20.4 10.8,20.9 94.9,22.9 96.5,22.9 98.1,22.9 11.5,24.3 94.9,24.5 98.1,24.5 11.5,25.1 94.9,26.1 96.5,26.1 106.8,26.9 108.4,26.9 110,26.9 131.994,28.056 6.5,28.5 8,28.5 14,28.5 15.5,28.5 106.8,28.5 110,28.5 6,29.5 16,29.5 106.8,30.1 108.4,30.1 6,31.5 10,32 12,32 16,32.5 6,34 12.8,34.3 12.8,36.1 106.8,36.2 108.4,36.2 110,36.2 6,36.4 106.8,37.8 110,37.8 16,37.9 131.994,38.056 10,38.4 12,38.4 6,38.9 106.8,39.4 108.4,39.4 96.5,40.5 6,40.9 16,40.9 103,41.5 6.5,41.9 8,41.9 14,41.9 15.5,41.9 131.994,46.056 73.5,46.3 74.1,46.3 74.7,46.3 102.85,46.4 103.45,46.4 18,46.8 18.6,46.8 19.2,46.8 103.15,47 102.85,47.6 103.45,47.6 89.625,48.843 91.375,48.857 90.5,49.5 89.625,50.143 91.375,50.157 80.217,50.177 78.2,50.2 79.2,50.2 80.217,51.177 78.2,51.2 15.7,51.4 14.1,51.7 15,51.7 78.2,52.2 79.2,52.2 80.2,52.2 134.994,53.056 10.8,53.7 5.4,53.9 6.2,53.9 22.5,53.9 23.3,53.9 10,54.2 10.8,54.6 10,55.1 11.6,55.1 13.2,55.1 57.6,55.5 69.6,55.5 57,55.8 70.2,55.8 57.6,56.1 69.6,56.1 15.6,56.4 88.6,56.5 88.6,57.1 15.6,57.2 30.1,57.3 30.9,57.3 88.6,57.7 10,58.5 11.6,58.5 13.2,58.5 88.6,58.9 10.8,59 10,59.4 88.6,59.5 10.8,59.9 88.6,60.1 99.7,61.7 99.7,62.45 99.7,63.2 11.5,63.3 11.5,64.1 96.3,64.8 96.3,65.55 96.3,66.3 6.5,67.5 8,67.5 14,67.5 15.5,67.5 6,68.5 16,68.5 94.3,69.5 84.1,69.8 85.2,69.8 94.3,70.25 6,70.5 84.7,70.7 10,71 12,71 94.3,71 16,71.5 84.1,71.7 85.2,71.7 6,73 12.8,73.3 12.8,75.1 6,75.4 16,76.9 10,77.4 12,77.4 6,77.9 86.3,79.4 86.9,79.4 87.5,79.4 83.6,79.6 6,79.9 16,79.9 83.6,80.1 83.6,80.6 6.5,80.9 8,80.9 14,80.9 15.5,80.9 83.6,81.1 83.6,81.6 83.6,82.1 83.6,82.6 83.6,83.1 83.6,83.6 83.6,84.1 83.6,84.6 83.6,85.1 83.6,85.6 92,86 94.3,86.4 92,86.6 94.3,87.15 92,87.2 94.3,87.9 81.3,88.2
  other v2: 10.8,17.1 11.6,17.1 12.5,17.1 10.8,18.5 11.6,18.5 12.5,18.5 62.8,19.7 64.2,19.7 62.8,20.3 64.2,20.3 62.8,20.9 64.2,20.9 24.8,22 25.4,22 26,22 24.8,23.4 25.4,23.4 26,23.4 46.2,28.1 46.8,28.1 47.4,28.1 56.7,28.4 57.3,28.4 57.9,28.4 34,28.8 34.6,28.8 35.2,28.8 46.2,29.5 46.8,29.5 47.4,29.5 56.7,29.8 57.3,29.8 57.9,29.8 24.8,29.9 25.4,29.9 26,29.9 34,30.2 34.6,30.2 35.2,30.2 24.8,31.3 25.4,31.3 26,31.3 10.8,56.1 11.6,56.1 12.5,56.1 10.8,57.5 11.6,57.5 12.5,57.5 62.8,63.9 64.2,63.9 62.8,64.5 64.2,64.5 62.8,65.1 64.2,65.1 24.8,66.2 25.4,66.2 26,66.2 24.8,67.6 25.4,67.6 26,67.6 46.2,72.3 46.8,72.3 47.4,72.3 56.7,72.6 57.3,72.6 57.9,72.6 34,73 34.6,73 35.2,73 46.2,73.7 46.8,73.7 47.4,73.7 56.7,74 57.3,74 57.9,74 24.8,74.1 25.4,74.1 26,74.1 34,74.4 34.6,74.4 35.2,74.4 24.8,75.5 25.4,75.5 26,75.5
GND_DIOT: B30.1 B31.1 B32.1 C1.1 C2.2 C56.1 C57.1 C59.1 C60.1 C121.1 C125.1 C126.1 C129.1 C133.1 C134.1 C147.1 C150.1 C151.1 C152.1 C153.1 C158.1 C159.1 C160.1 C161.1 C162.1 C163.2 C164.1 C165.1 C166.1 C167.1 C169.1 C170.1 C171.1 C173.1 C174.2 C179.1 C180.1 C181.1 C182.1 C219.1 C220.1 C298.1 C306.1 C307.1 D21.2 D23.2 D24.2 D27.2 FL1.4 IC9.1 IC9.3 IC11.5 IC12.5 IC13.5 IC26.7 IC27.2 IC27.3 IC27.4 IC28.2 IC28.3 IC28.4 IC29.2 IC29.3 IC29.4 IC33.2 IC33.3 IC33.4 IC34.2 IC34.3 IC34.4 IC36.3 IC36.4 IC36.11 IC37.4 IC37.5 IC37.6 IC38.2 IC40.7 IC41.3 IC41.4 IC41.5 IC41.7 IC42.1 IC43.2 IC44.1 IC44.2 IC44.3 IC44.4 IC45.2 IC46.1 IC46.2 IC46.3 IC46.4 J6.A2 J6.A4 J6.A6 J6.C1 J6.C5 J6.D2 J6.D4 J6.D6 J6.F1 J6.F5 J6.G2 J6.G4 J6.G6 J6.I1 J6.I5 J6.J2 J6.J4 J6.J6 J6.L1 J6.L5 J7.A2 J7.A4 J7.A6 J7.C1 J7.C3 J7.C5 J7.C7 J7.D2 J7.D4 J7.D6 J7.F1 J7.F3 J7.F5 J7.F7 J7.G2 J7.G4 J7.G6 J7.G8 J7.I1 J7.I3 J7.I5 J7.I7 J7.J2 J7.J4 J7.J6 J7.J8 J7.L1 J7.L3 J7.L5 J7.L7 J8.1 J8.4 J8.7 J8.10 J8.13 J8.16 J8.19 J8.22 J8.25 J9.1 J9.4 J9.7 J9.10 J9.13 J9.16 J9.19 J9.22 J9.25 L10.2 LD11.1 R1.2 R2.2 R85.1 R86.1 R91.1 R92.1 R93.1 R94.1 R99.1 R119.1 R120.1 R121.1 R129.1 R137.1 T1.2 T2.2 T18.2 T19.2 T20.2 T22.2 | length 68.3
  L1 w0.125: IC37.6@187.319,15.356 187.319,14.431 187.494,14.256 187.794,14.256 187.969,14.431 IC37.5@187.969,15.356 ; R137.1@187.764,16.956 187.764,16.486 187.969,16.281 IC37.5@187.969,15.356 ; v1(188.494,15.356) IC37.5@187.969,15.356
  L1 w0.15: B31.1@170.394,10.956 171.194,10.156 v1(171.744,10.156) ; B30.1@177.294,67.956 178.531,69.193 178.531,69.468 v1(178.544,69.481) ; FL1.4@190.094,89.206 190.144,89.256 B32.1@193.094,89.256
  L1 w0.2: C56.1@152.394,62.906 152.844,62.906 153.059,63.121 IC9.3@154.094,63.121 ; v1(167.694,-1.594) T2.2@168.344,-1.594 ; v1(171.744,10.156) C182.1@172.494,10.156 ; v1(176.294,9.956) IC40.7@176.294,10.506 ; IC41.3@178.544,-1.144 v1(178.544,-0.144) ; IC41.4@179.194,-1.144 v1(179.194,-0.144) ; IC41.5@179.844,-1.144 v1(179.844,-0.144) ; IC41.7@181.144,-1.144 v1(181.144,-0.144) ; R129.1@181.494,81.956 v1(182.144,81.956) ; D27.2@183.094,25.556 v1(183.894,25.556) ; C179.1@186.094,8.756 v1(186.094,9.606) ; v1(187.044,1.156) T20.2@187.044,1.806 ; v1(187.044,4.656) T19.2@187.044,5.306 ; v1(190.794,-0.244) D24.2@191.594,-0.244 ; v1(190.794,2.556) D23.2@191.494,2.556 D23.2@191.594,2.556 ; IC44.4@199.794,16.751 v1(200.944,16.751) ; IC44.3@199.794,18.021 v1(200.944,18.021) ; IC44.2@199.794,19.291 v1(200.944,19.291) ; IC44.1@199.794,20.561 v1(200.944,20.561) ; IC46.4@199.794,22.351 v1(200.944,22.351) ; IC46.3@199.794,23.621 v1(200.944,23.621) ; IC46.2@199.794,24.891 v1(200.944,24.891) ; IC46.1@199.794,26.161 v1(200.944,26.161) ; IC43.2@207.194,17.656 v1(208.044,17.656) ; IC45.2@207.194,23.356 v1(208.044,23.356)
  L1 w0.3: v1(151.844,57.206) C57.1@152.394,57.206 ; v1(151.844,62.906) C56.1@152.394,62.906 ; IC11.5@154.094,59.961 v1(154.094,60.511) ; IC9.1@154.094,65.661 v1(154.094,66.211) ; IC13.5@158.194,54.261 v1(158.194,54.811) ; v1(159.144,48.406) C60.1@159.144,48.956 ; IC12.5@160.894,48.661 v1(160.894,49.211) ; v1(161.844,42.806) C59.1@161.844,43.356 ; C181.1@171.144,-1.944 v1(171.768,-1.944) ; v1(171.144,8.381) T1.2@171.144,9.006 ; v1(172.519,-1.944) C180.1@173.144,-1.944 ; v1(173.374,5.156) IC42.1@173.999,5.156 ; v1(175.169,4.306) C1.1@175.794,4.306 ; v1(177.494,74.681) C166.1@177.494,75.306 ; v1(178.544,69.481) T18.2@178.544,70.106 ; C298.1@181.244,15.856 v1(181.244,16.48) ; v1(183.969,15.306) C169.1@184.594,15.306 ; IC37.4@187.969,10.956 v1(188.493,10.956) ; IC38.2@192.294,8.356 v1(192.294,9.18) ; C173.1@192.894,6.656 v1(193.618,6.656) ; v1(193.594,12.131) C174.2@193.594,12.956 v1(193.594,13.78) ; C219.1@206.894,20.106 v1(207.518,20.106) ; C220.1@206.894,25.756 v1(207.518,25.756) ; v1(208.944,14.631) C306.1@208.944,15.256 ; v1(208.944,20.331) C307.1@208.944,20.956
  L6 w0.15: v1(-5.2,7.5) -5.2,8.3 -4.721,8.779 LD11.1@-4.721,9.649
  L6 w0.3: C151.1@144.394,14.106 v1(144.394,14.656) ; C147.1@144.394,31.706 v1(144.394,32.256) ; v1(145.444,11.506) C150.1@145.444,12.056 ; v1(145.444,29.106) C134.1@145.444,29.656 ; IC26.7@147.462,1.661 148.357,2.556 C121.1@149.03,2.556 ; R99.1@148.324,10.756 v1(148.324,11.306) ; R93.1@148.324,28.356 v1(148.324,28.906) ; R119.1@151.764,13.756 v1(151.764,14.306) ; R94.1@151.764,31.356 v1(151.764,31.906) ; v1(153.494,4.156) C129.1@153.494,4.706 ; v1(153.494,21.756) C152.1@153.494,22.306 ; v1(153.494,39.356) C125.1@153.494,39.906 ; v1(154.494,4.156) C133.1@154.494,4.706 ; v1(154.494,21.756) C153.1@154.494,22.306 ; v1(154.494,39.356) C126.1@154.494,39.906 ; R92.1@156.124,10.356 v1(156.124,10.906) ; R121.1@156.124,27.956 v1(156.124,28.506) ; R86.1@156.124,45.556 v1(156.124,46.106) ; v1(157.824,5.006) R91.1@157.824,5.556 ; v1(157.824,22.606) R120.1@157.824,23.156 ; v1(157.824,40.206) R85.1@157.824,40.756 ; v1(171.094,83.956) 171.694,84.556 171.794,84.556 171.944,84.706 T22.2@171.944,84.906
  other v1: 39.4,-2.2 6.9,-1.6 39.4,-1.4 6.3,-1.2 143.994,3.056 143.994,10.056 213.994,17.056 143.994,23.056 189.194,27.068 189.194,28.517 184.394,31.556 184.394,33.056 186.994,34.056 181.394,34.556 181.394,35.956 151.994,38.056 201.594,38.156 199.97,38.635 188.094,38.856 209.994,39.056 189.17,39.798 144.994,40.056 199.169,41.013 209.229,43.072 215.406,43.058 203.037,43.084 187.294,44.056 185.894,44.556 203.235,45.714 209.458,45.866 215.406,45.852 198.694,46.356 200.294,46.356 213.545,48.556 214.994,48.556 206.894,53.156 208.343,53.156 200.394,54.856 206.694,54.881 150.994,55.056 200.394,56.156 206.694,56.33 202.573,58.26 214.994,59.056 203.716,59.53 150.994,60.056 214.994,69.056 171.394,69.656 164.994,70.056 171.394,70.356 171.394,71.056 172.494,71.256 166.894,71.356 166.894,72.056 166.894,72.756 167.494,73.356 167.694,74.056 167.694,74.756 181.894,76.656 182.594,76.656 179.694,77.456 165.994,79.056 179.994,79.656 179.494,80.356 180.194,80.356 191.394,82.256 186.294,83.356 186.294,84.056 184.394,84.156 191.294,84.356 184.394,84.856 185.094,84.856 185.794,84.856 185.794,85.656 168.994,86.056 189.194,86.756 191.394,86.756 168.994,90.056 171.244,90.426 171.944,90.426 172.644,90.426 173.694,90.456 174.394,90.456 175.094,90.456
GND_LLC: C130.2 C131.2 C135.2 C136.1 C141.2 C142.1 C143.1 C144.1 C168.1 D8.2 IC30.10 IC31.3 L10.3 P1.1 R105.1 R110.1 R111.1 R112.1 R113.1 SW1.1 | length 7.7
  L1 w0.2: v1(147.594,77.656) R110.1@148.294,77.656 ; v1(148.294,78.656) C143.1@148.294,79.356 ; v1(149.444,74.506) P1.1@150.444,74.506 ; v1(149.894,78.656) R112.1@149.894,79.356 ; v1(151.394,78.706) C142.1@151.394,79.406 ; D8.2@154.794,75.756 v1(155.494,75.756) ; C144.1@156.494,79.556 v1(157.194,79.556) ; R113.1@156.494,81.156 v1(157.194,81.156) ; v1(158.394,81.456) R111.1@159.094,81.456
  L6 w0.3: v1(148.044,85.806) C141.2@148.594,85.806 ; C136.1@155.344,90.056 v1(155.894,90.056)
  other v1: 145.994,65.056 153.994,70.056 132.994,77.056 143.994,78.056 161.994,78.056 146.994,80.756 128.994,81.056 146.994,81.456 146.994,82.156 146.994,82.856 146.994,83.556 135.294,84.956 135.994,84.956 134.694,85.156 136.594,85.156 136.594,85.756 124.994,86.056 124.994,91.056
I2C_SCL1: D27.6 IC45.1 IC46.6 J9.27 | length 49.5
  L1 w0.125: J9.27@173.01,23.583 174.333,24.906 D27.6@180.894,24.906 ; IC46.6@205.194,23.621 205.669,23.621 205.906,23.858 205.906,23.868 206.344,24.306 IC45.1@207.194,24.306
  L1 w0.2: v1(204.044,23.621) IC46.6@205.194,23.621
  L6 w0.125: J9.27@173.01,23.583 174.294,24.866 174.294,26.656 175.094,27.456 184.259,27.456 185.359,26.356 189.494,26.356 190.694,27.556 202.394,27.556 204.044,25.906 v1(204.044,23.621)
I2C_SDA1: D27.4 IC45.3 IC46.5 J9.26 | length 42.1
  L1 w0.125: J9.26@175.55,26.123 177.961,26.123 178.044,26.206 D27.4@180.894,26.206 ; IC46.5@205.194,22.351 207.139,22.351 IC45.3@207.194,22.406
  L1 w0.2: v1(204.044,22.351) IC46.5@205.194,22.351
  L6 w0.125: J9.26@175.55,26.123 177.961,26.123 178.894,27.056 184.094,27.056 185.194,25.956 189.694,25.956 190.994,27.256 194.894,27.256 195.194,26.956 202.294,26.956 203.494,25.756 203.494,22.901 v1(204.044,22.351)
LLC_CF: C142.2 IC30.3 | length 2.3
  L1 w0.3: IC30.3@151.089,83.031 151.094,83.026 151.094,82.056 151.394,81.756 C142.2@151.394,80.906
LLC_Css: C141.1 IC30.1 R106.1 | length 3.8
  L1 w0.3: IC30.1@148.549,83.031 v1(148.549,84.101)
  L6 w0.3: C141.1@148.594,84.906 148.549,84.861 v1(148.549,84.101) 149.339,84.101 149.744,84.506 149.794,84.506 150.094,84.806 R106.1@150.094,84.856
LLC_Delay: C143.2 IC30.2 R112.2 | length 3.7
  L1 w0.3: C143.2@148.294,80.956 R112.2@149.894,80.956 149.894,81.756 149.794,81.856 149.794,83.006 IC30.2@149.819,83.031
LLC_DIS: IC30.8 R111.2 | length 1.7
  L1 w0.3: IC30.8@157.439,83.031 159.069,83.031 R111.2@159.094,83.056
LLC_HVG: D1.1 IC30.15 R100.1 | length 7.8
  L1 w0.5: R100.1@144.794,85.156 144.794,85.856 145.294,86.356 D1.1@145.294,86.956 149.394,86.956 149.819,87.381 IC30.15@149.819,88.481
LLC_ISEN: C144.2 D7.1 IC30.6 R104.2 R113.2 | length 19.2
  L1 w0.2: R104.2@141.294,79.256 v1(141.994,79.256)
  L1 w0.3: D7.1@154.794,77.756 154.794,78.556 154.894,78.656 v1(154.894,78.856) C144.2@154.894,79.556 R113.2@154.894,81.156 154.899,81.161 IC30.6@154.899,83.031
  L6 w0.2: v1(141.994,79.256) 144.094,79.256 144.294,79.456 153.694,79.456 154.294,78.856 v1(154.894,78.856)
LLC_LVG: D4.1 IC30.11 R103.1 | length 14.4
  L1 w0.5: D4.1@145.294,88.956 145.213,88.956 145.213,89.636 144.949,89.9 144.949,90.6 R103.1@144.794,90.756 146.794,90.756 147.094,91.056 154.194,91.056 154.899,90.351 IC30.11@154.899,88.481
LLC_OUT: C132.1 IC30.14 T7.1 T7.5 T7.6 Tr1.1 | length 5
  L1 w0.6: T7.1@139.594,86.356 v1(141.089,86.356) ; C132.1@150.244,90.156 151.089,89.311 IC30.14@151.089,88.481 151.089,86.961 v1(151.094,86.956)
  other v1: 140.541,86.356 151.094,87.456
LLC_RFmin: C138.2 IC30.4 IC31.4 R106.2 R107.2 R108.2 | length 23.2
  L1 w0.2: IC31.4@145.349,69.486 150.624,69.486 151.494,70.356 151.494,75.056 151.794,75.356 152.894,75.356 153.094,75.556 153.094,76.106 153.064,76.136 R108.2@153.064,76.156 153.064,76.786 152.994,76.856 C138.2@152.994,77.656 152.994,78.456 153.294,78.756 R107.2@153.294,79.356 153.244,79.356 152.894,79.706 152.894,79.756 152.359,80.291 IC30.4@152.359,83.031
  L1 w0.3: v1(152.346,84.003) 152.346,83.043 IC30.4@152.359,83.031
  L6 w0.3: R106.2@151.694,84.856 151.694,84.806 151.994,84.506 152.044,84.506 152.327,84.223 152.327,84.023 v1(152.346,84.003)
LLC_STBY: IC30.5 R107.1 | length 2.2
  L1 w0.2: R107.1@153.294,80.956 153.294,81.756 153.629,82.091 IC30.5@153.629,83.031
LLC_VCC: C135.1 C136.2 IC30.12 R101.1 R102.1 | length 3
  L1 w0.6: IC30.12@153.629,88.481 153.629,89.791 v1(153.894,90.056)
  L6 w0.3: R102.1@153.594,86.226 v1(153.594,86.956) ; v1(153.894,90.056) C136.2@154.444,90.056
LO_IN_A: C222A.2 J10.1 | length 4.9
  L1 w0.132: J10.1@0.4,25.3 2.7,25.3 2.75,25.25 C222A.2@5.3,25.25
LO_IN_B: C222B.2 J3.1 | length 4.9
  L1 w0.132: J3.1@0.4,64.3 2.7,64.3 2.75,64.25 C222B.2@5.3,64.25
LT3045_P5V0: C200.2 C201.2 IC52.10 IC52.11 IC52.12 L3.1 R197.2 | length 9.8
  L1 w0.3: R197.2@87.5,45.43 87.5,43.6 88.3,42.8 90.5,42.8 90.825,43.125 IC52.10@90.825,47.3
LT3094_N5V0: C207.2 C208.2 IC54.10 IC54.11 IC54.12 L4.1
N5V0: B3.1 C21A.2 C21B.2 C22A.2 C22B.2 C26A.2 C26B.2 C27A.2 C27B.2 C28A.2 C28B.2 C29A.2 C29B.2 C30A.2 C30B.2 C31A.2 C31B.2 C32A.2 C32B.2 C33A.2 C33B.2 C35A.2 C35B.2 C36A.2 C36B.2 C37A.2 C37B.2 C38A.2 C38B.2 C46A.2 C46B.2 C46C.2 C46D.2 C46E.2 C46F.2 C46G.2 C46H.2 C63A.2 C63B.2 C63C.2 C63D.2 C63E.2 C63F.2 C63G.2 C63H.2 C77A.2 C77B.2 C77C.2 C77D.2 C77E.2 C77F.2 C77G.2 C77H.2 C94A.2 C94B.2 C95A.2 C95B.2 C96A.2 C96B.2 C104A.2 C104B.2 C116A.2 C116B.2 C178A.2 C178B.2 C206.1 C209.2 IC2A.5 IC2B.5 IC3A.5 IC3B.5 IC4A.5 IC4B.5 IC5A.5 IC5B.5 IC7A.5 IC7B.5 IC8A.7 IC8A.8 IC8B.7 IC8B.8 IC14A.5 IC14B.5 IC15A.4 IC15B.4 IC15C.4 IC15D.4 IC15E.4 IC15F.4 IC15G.4 IC15H.4 IC16A.4 IC16B.4 IC16C.4 IC16D.4 IC16E.4 IC16F.4 IC16G.4 IC16H.4 IC17A.4 IC17B.4 IC17C.4 IC17D.4 IC17E.4 IC17F.4 IC17G.4 IC17H.4 IC21A.4 IC21B.4 IC22A.4 IC22B.4 IC23A.4 IC23B.4 IC24A.4 IC24B.4 IC51A.4 IC51B.4 L4.2 R202.2 | length 77.3
  L1 w0.3: IC17C.4@29.825,42.45 29.825,43.975 C77C.2@29.85,44 v1(29.85,44.53) ; IC17G.4@29.825,86.65 29.825,88.175 C77G.2@29.85,88.2 v1(29.85,88.73) ; v1(32.85,14.57) C46B.2@32.85,15.1 32.875,15.125 IC15B.4@32.875,16.65 ; v1(32.85,58.77) C46F.2@32.85,59.3 32.875,59.325 IC15F.4@32.875,60.85 ; IC16C.4@35.425,42.45 35.425,43.975 C63C.2@35.45,44 v1(35.45,44.53) ; IC16G.4@35.425,86.65 35.425,88.175 C63G.2@35.45,88.2 v1(35.45,88.73) ; v1(38.45,14.57) C63B.2@38.45,15.1 38.475,15.125 IC16B.4@38.475,16.65 ; v1(38.45,58.77) C63F.2@38.45,59.3 38.475,59.325 IC16F.4@38.475,60.85 ; IC15C.4@41.025,42.45 41.025,43.975 C46C.2@41.05,44 v1(41.05,44.53) ; IC15G.4@41.025,86.65 41.025,88.175 C46G.2@41.05,88.2 v1(41.05,88.73) ; IC17A.4@41.925,12.95 41.925,14.475 C77A.2@41.95,14.5 v1(41.95,15.03) ; IC17E.4@41.925,57.15 41.925,58.675 C77E.2@41.95,58.7 v1(41.95,59.23) ; v1(44.05,14.57) C77B.2@44.05,15.1 44.075,15.125 IC17B.4@44.075,16.65 ; v1(44.05,58.77) C77F.2@44.05,59.3 44.075,59.325 IC17F.4@44.075,60.85 ; v1(46.05,34.47) C46D.2@46.05,35 46.075,35.025 IC15D.4@46.075,36.55 ; v1(46.05,78.67) C46H.2@46.05,79.2 46.075,79.225 IC15H.4@46.075,80.75 ; IC16A.4@47.525,12.95 47.525,14.475 C63A.2@47.55,14.5 v1(47.55,15.03) ; IC16E.4@47.525,57.15 47.525,58.675 C63E.2@47.55,58.7 v1(47.55,59.23) ; v1(51.65,34.47) C63D.2@51.65,35 51.675,35.025 IC16D.4@51.675,36.55 ; v1(51.65,78.67) C63H.2@51.65,79.2 51.675,79.225 IC16H.4@51.675,80.75 ; IC15A.4@53.125,12.95 53.125,14.475 C46A.2@53.15,14.5 v1(53.15,15.03) ; IC15E.4@53.125,57.15 53.125,58.675 C46E.2@53.15,58.7 v1(53.15,59.23) ; v1(57.25,34.47) C77D.2@57.25,35 57.275,35.025 IC17D.4@57.275,36.55 ; v1(57.25,78.67) C77H.2@57.25,79.2 57.275,79.225 IC17H.4@57.275,80.75 ; IC22A.4@76.05,16.475 77.575,16.475 C104A.2@77.6,16.45 v1(78.13,16.45) ; IC23A.4@76.05,22.075 77.575,22.075 C116A.2@77.6,22.05 v1(78.13,22.05) ; IC24A.4@76.05,27.675 77.575,27.675 C178A.2@77.6,27.65 v1(78.13,27.65) ; IC21A.4@76.05,33.275 77.575,33.275 C96A.2@77.6,33.25 v1(78.13,33.25) ; IC22B.4@76.05,60.675 77.575,60.675 C104B.2@77.6,60.65 v1(78.13,60.65) ; IC23B.4@76.05,66.275 77.575,66.275 C116B.2@77.6,66.25 v1(78.13,66.25) ; IC24B.4@76.05,71.875 77.575,71.875 C178B.2@77.6,71.85 v1(78.13,71.85) ; IC21B.4@76.05,77.475 77.575,77.475 C96B.2@77.6,77.45 v1(78.13,77.45) ; B3.1@80.2,76.6 C206.1@80.2,78.7
  L1 w0.4: v1(80.4,90.475) 81.3,91.375 86.7,91.375 87.35,90.725 R202.2@87.35,90
  other v1: 56.9,8.3 57.5,8.3 58.1,8.3 57.6,12.7 22.4,13.2 57.6,13.4 22.7,13.8 26.1,19.3 60.1,19.6 60.6,19.6 61.1,19.6 26.1,19.8 26.1,20.3 58,25.7 47.5,25.9 35.3,26.1 58,26.2 47.5,26.4 35.3,26.6 58,26.7 35.3,27.1 26.1,27.2 26.1,27.7 26.1,28.2 56.9,52.5 57.5,52.5 58.1,52.5 57.6,56.9 22.4,57.4 57.6,57.6 22.7,58 26.1,63.5 60.1,63.8 60.6,63.8 61.1,63.8 26.1,64 26.1,64.5 58,69.9 47.5,70.1 35.3,70.3 58,70.4 47.5,70.6 35.3,70.8 58,70.9 35.3,71.3 26.1,71.4 26.1,71.9 26.1,72.4 78.8,78.675 78.8,79.375 78.8,80.075 79.5,80.075
N5V0_ILIM: IC54.6 R204.2 | length 1.3
  L1 w0.2: R204.2@85.17,90.5 85.2,90.47 IC54.6@85.2,89.225
N5V0_SET: C212.2 IC54.8 R205.2 R206.2 | length 3.8
  L1 w0.2: R206.2@78.6,89.15 C212.2@80.6,89.15 81.25,89.15 81.625,88.775 IC54.8@82.2,88.775
N6V0: B16.1 C92.1 C93.1 C210.2 C211.2 D13.2 D14.2 IC54.1 IC54.2 IC54.3 IC54.13
NetB15_1: B15.1 C167.2 L10.1 T21.5 T21.6 T21.7 T21.8
NetC3A_1: C3A.1 IC2A.3 R5A.1 R24A.2 | length 3.4
  L1 w0.25: R24A.2@20.6,30.63 R5A.1@21.6,30.63 22.58,30.63 C3A.1@22.6,30.65 22.9,30.35 IC2A.3@23.9,30.35
NetC3A_2: C3A.2 IC2A.2 R5A.2 | length 2.6
  L1 w0.25: R5A.2@21.6,31.57 21.62,31.55 C3A.2@22.6,31.55 22.95,31.2 23.104,31.2 23.331,30.973 23.452,30.973 23.575,30.85 IC2A.2@23.9,30.85
NetC3B_1: C3B.1 IC2B.3 R5B.1 R24B.2 | length 3.4
  L1 w0.25: R24B.2@20.6,74.83 R5B.1@21.6,74.83 22.58,74.83 C3B.1@22.6,74.85 22.9,74.55 IC2B.3@23.9,74.55
NetC3B_2: C3B.2 IC2B.2 R5B.2 | length 2.6
  L1 w0.25: R5B.2@21.6,75.77 21.62,75.75 C3B.2@22.6,75.75 22.95,75.4 23.104,75.4 23.331,75.173 23.452,75.173 23.575,75.05 IC2B.2@23.9,75.05
NetC6A_1: C6A.1 IC3A.3 R7A.1 R13A.1 R22A.2 | length 4.4
  L1 w0.25: R7A.1@41.97,29.5 R22A.2@41.97,28.5 42.02,28.55 C6A.1@44,28.55 IC3A.3@45.3,28.55
NetC6A_2: C6A.2 IC1A.4 IC3A.2 R4A.1 R13A.2 | length 6.1
  L1 w0.25: IC1A.4@41.75,32.035 42.565,32.035 43.03,31.57 R4A.1@43.03,30.5 43,30.47 R13A.2@43,29.47 43.02,29.45 C6A.2@44,29.45 44.365,29.085 44.403,29.085 44.438,29.05 IC3A.2@45.3,29.05
NetC6B_1: C6B.1 IC3B.3 R7B.1 R13B.1 R22B.2 | length 4.4
  L1 w0.25: R7B.1@41.97,73.7 R22B.2@41.97,72.7 42.02,72.75 C6B.1@44,72.75 IC3B.3@45.3,72.75
NetC6B_2: C6B.2 IC1B.4 IC3B.2 R4B.1 R13B.2 | length 6.1
  L1 w0.25: IC1B.4@41.75,76.235 42.565,76.235 43.03,75.77 R4B.1@43.03,74.7 43,74.67 R13B.2@43,73.67 43.02,73.65 C6B.2@44,73.65 44.365,73.285 44.403,73.285 44.438,73.25 IC3B.2@45.3,73.25
NetC7A_1: C7A.1 IC5A.3 R8A.1 R16A.1 R34A.2 R45A.2 | length 7.2
  L1 w0.25: R45A.2@52.47,27.8 R34A.2@52.47,28.8 ; R8A.1@53.5,30.73 52.73,30.73 52.5,30.5 52.5,28.83 R34A.2@52.47,28.8 ; IC5A.3@55.8,28.85 C7A.1@54.5,28.85 54.45,28.8 R34A.2@52.47,28.8
NetC7A_2: C7A.2 IC5A.2 R9A.1 R16A.2 | length 3.5
  L1 w0.25: R16A.2@53.5,29.77 54.48,29.77 C7A.2@54.5,29.75 ; R9A.1@54.5,30.73 C7A.2@54.5,29.75 ; IC5A.2@55.8,29.35 55.15,29.35 54.935,29.565 54.685,29.565 C7A.2@54.5,29.75
NetC7B_1: C7B.1 IC5B.3 R8B.1 R16B.1 R34B.2 R45B.2 | length 7.2
  L1 w0.25: R45B.2@52.47,72 R34B.2@52.47,73 ; R8B.1@53.5,74.93 52.73,74.93 52.5,74.7 52.5,73.03 R34B.2@52.47,73 ; IC5B.3@55.8,73.05 C7B.1@54.5,73.05 54.45,73 R34B.2@52.47,73
NetC7B_2: C7B.2 IC5B.2 R9B.1 R16B.2 | length 3.5
  L1 w0.25: R16B.2@53.5,73.97 54.48,73.97 C7B.2@54.5,73.95 ; R9B.1@54.5,74.93 C7B.2@54.5,73.95 ; IC5B.2@55.8,73.55 55.15,73.55 54.935,73.765 54.685,73.765 C7B.2@54.5,73.95
NetC10A_1: C10A.1 IC7A.3 L2A.2 R10A.2 R18A.2 R19A.2 R20A.1 R40A.2 | length 9.6
  L1 w0.25: R40A.2@61.07,29.1 R19A.2@63.23,29.1 R10A.2@63.23,28.1 63.23,27.67 63.4,27.5 L2A.2@63.4,26.6 63.4,25.7 63.27,25.57 R18A.2@63.27,25.1 63.27,24.14 R20A.1@63.23,24.1 63.23,23.12 C10A.1@63.25,23.1 IC7A.3@63.25,21.8
NetC10A_2: C10A.2 C80A.1 C81A.2 C82A.1 C83A.1 C84A.2 C85A.1 C86A.1 C87A.1 C88A.1 C97A.2 C98A.1 C99A.1 C100A.1 C101A.1 C102A.2 C105A.1 C106A.2 C107A.1 C108A.1 C109A.1 C110A.1 C111A.1 C112A.2 C113A.1 C114A.1 C117A.2 C118A.1 C119A.1 C120A.2 C154A.1 C155A.1 C156A.1 C157A.1 C175A.1 C176A.1 C183A.1 D11A.1 D12A.1 IC7A.2 R20A.2 | length 20.6
  L1 w0.25: IC7A.2@63.75,21.8 63.75,22.662 63.785,22.697 63.785,22.735 C10A.2@64.15,23.1 64.15,24.08 R20A.2@64.17,24.1
  L1 w0.4: R20A.2@64.17,24.1 64.17,24.12 64.26,24.21 64.28,24.21 65.27,25.2 v1(72.1,25.2)
  L1 w0.45: C183A.1@69.9,38 v1(69.9,39.2) 69.9,39.8 70.55,40.45 D11A.1@71.65,40.45 v1(71.65,41.25)
  L6 w0.45: v1(69.9,39.2) 71.6,37.5 71.6,36.775 72.1,36.275 C85A.1@72.1,36.1 ; v1(71.65,41.25) D12A.1@71.65,42.35
NetC10B_1: C10B.1 IC7B.3 L2B.2 R10B.2 R18B.2 R19B.2 R20B.1 R40B.2 | length 9.6
  L1 w0.25: R40B.2@61.07,73.3 R19B.2@63.23,73.3 R10B.2@63.23,72.3 63.23,71.87 63.4,71.7 L2B.2@63.4,70.8 63.4,69.9 63.27,69.77 R18B.2@63.27,69.3 63.27,68.34 R20B.1@63.23,68.3 63.23,67.32 C10B.1@63.25,67.3 IC7B.3@63.25,66
NetC10B_2: C10B.2 C80B.1 C81B.2 C82B.1 C83B.1 C84B.2 C85B.1 C86B.1 C87B.1 C88B.1 C97B.2 C98B.1 C99B.1 C100B.1 C101B.1 C102B.2 C105B.1 C106B.2 C107B.1 C108B.1 C109B.1 C110B.1 C111B.1 C112B.2 C113B.1 C114B.1 C117B.2 C118B.1 C119B.1 C120B.2 C154B.1 C155B.1 C156B.1 C157B.1 C175B.1 C176B.1 C183B.1 D11B.1 D12B.1 IC7B.2 R20B.2 | length 20.6
  L1 w0.25: IC7B.2@63.75,66 63.75,66.862 63.785,66.897 63.785,66.935 C10B.2@64.15,67.3 64.15,68.28 R20B.2@64.17,68.3
  L1 w0.4: R20B.2@64.17,68.3 64.17,68.32 64.26,68.41 64.28,68.41 65.27,69.4 v1(72.1,69.4)
  L1 w0.45: C183B.1@69.9,82.2 v1(69.9,83.4) 69.9,84 70.55,84.65 D11B.1@71.65,84.65 v1(71.65,85.45)
  L6 w0.45: v1(69.9,83.4) 71.6,81.7 71.6,80.975 72.1,80.475 C85B.1@72.1,80.3 ; v1(71.65,85.45) D12B.1@71.65,86.55
NetC20A_1: C20A.1 IC8A.10 R23A.2 R35A.1 | length 5.2
  L1 w0.25: R35A.1@60.6,4.3 61.75,4.3 C20A.1@62.15,4.7 ; C20A.1@62.13,4.7 62.13,5.43 62.4,5.7 ; IC8A.10@62.33,7.3 62.33,5.77 62.4,5.7 ; R23A.2@63.13,5.7 62.4,5.7
NetC20A_2: C20A.2 R21A.2 | length 1.1
  L1 w0.25: C20A.2@63.05,4.7 R21A.2@64.13,4.7
NetC20B_1: C20B.1 IC8B.10 R23B.2 R35B.1 | length 5.2
  L1 w0.25: R35B.1@60.6,48.5 61.75,48.5 C20B.1@62.15,48.9 ; C20B.1@62.13,48.9 62.13,49.63 62.4,49.9 ; IC8B.10@62.33,51.5 62.33,49.97 62.4,49.9 ; R23B.2@63.13,49.9 62.4,49.9
NetC20B_2: C20B.2 R21B.2 | length 1.1
  L1 w0.25: C20B.2@63.05,48.9 R21B.2@64.13,48.9